# Altium PCB MSP430.PcbDoc
Units mil, origin at the board's own origin, x right, y up, seen from the top; angles counter-clockwise.
Board outline 2295 x 3110 mil, 2 copper layers (Top Layer, Bottom Layer); 33 components, 27 nets, 181 pads, 21 vias.
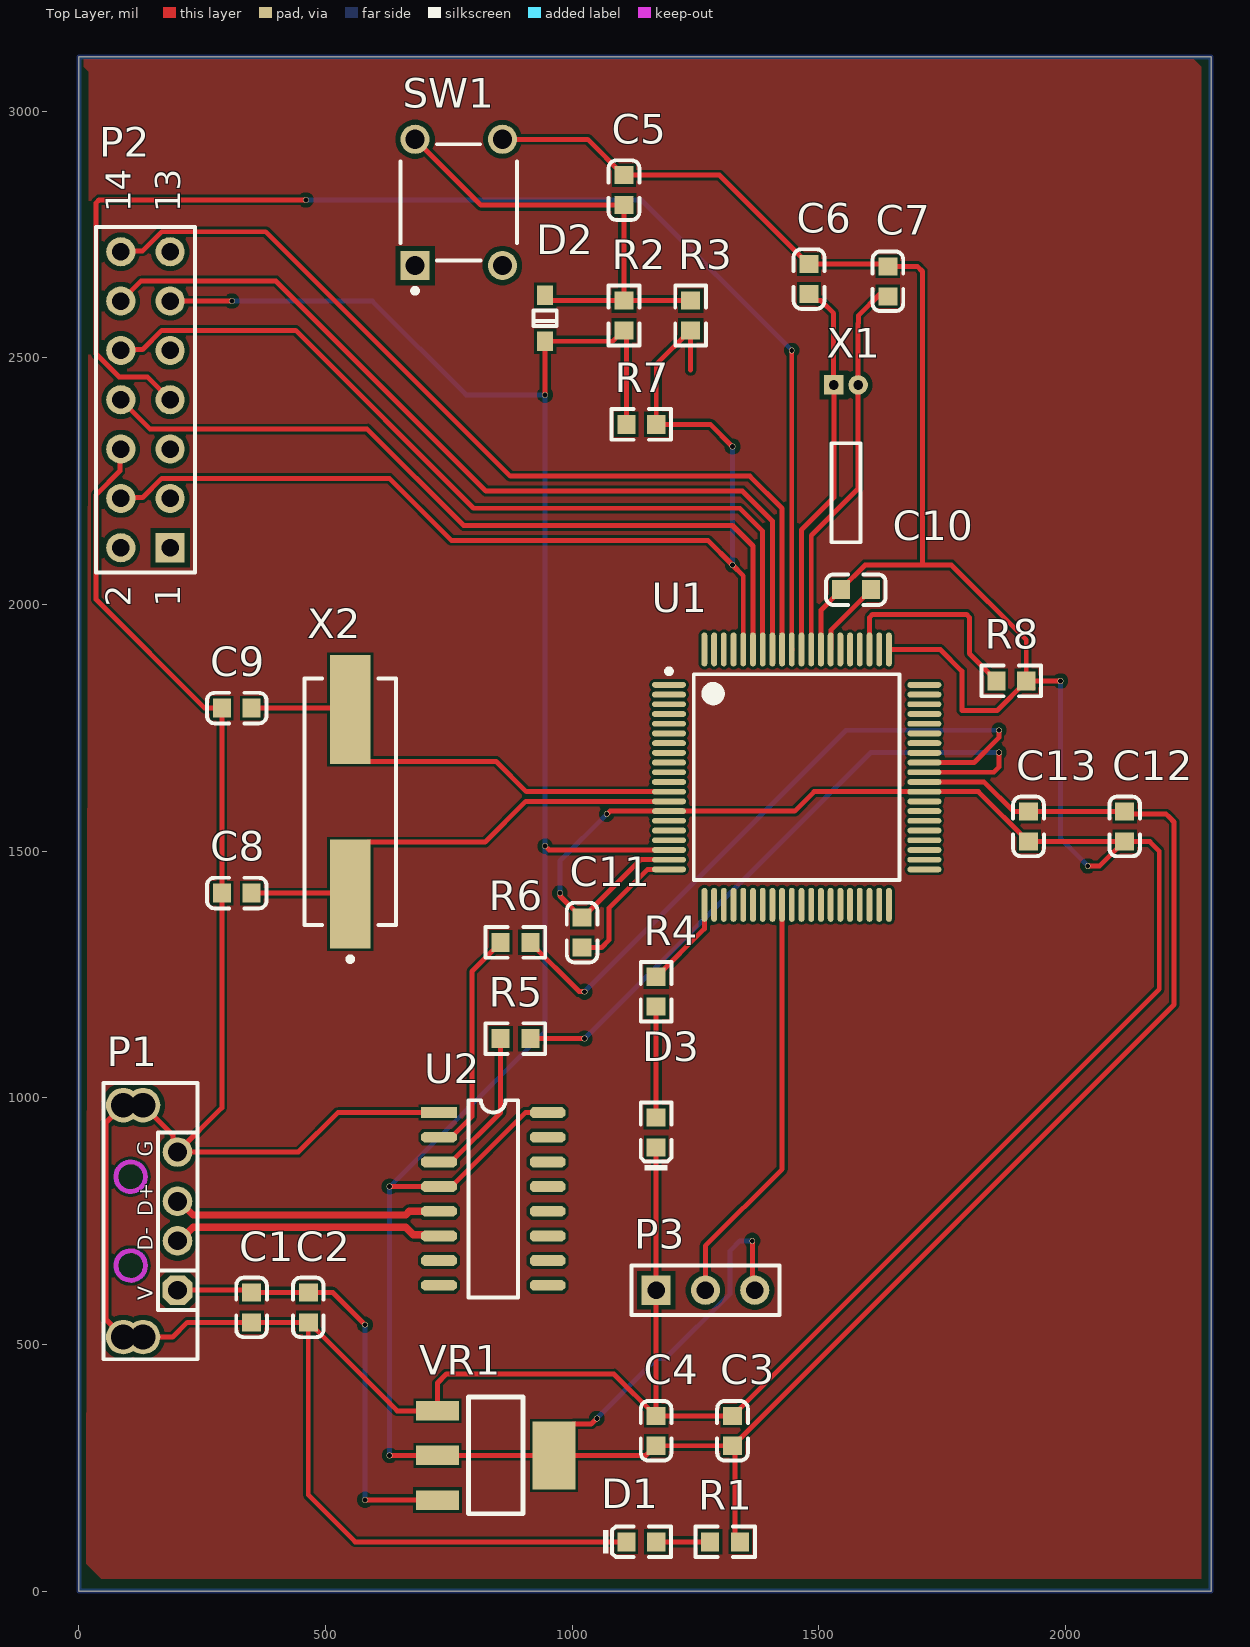
[diagram p0: Top Layer view]
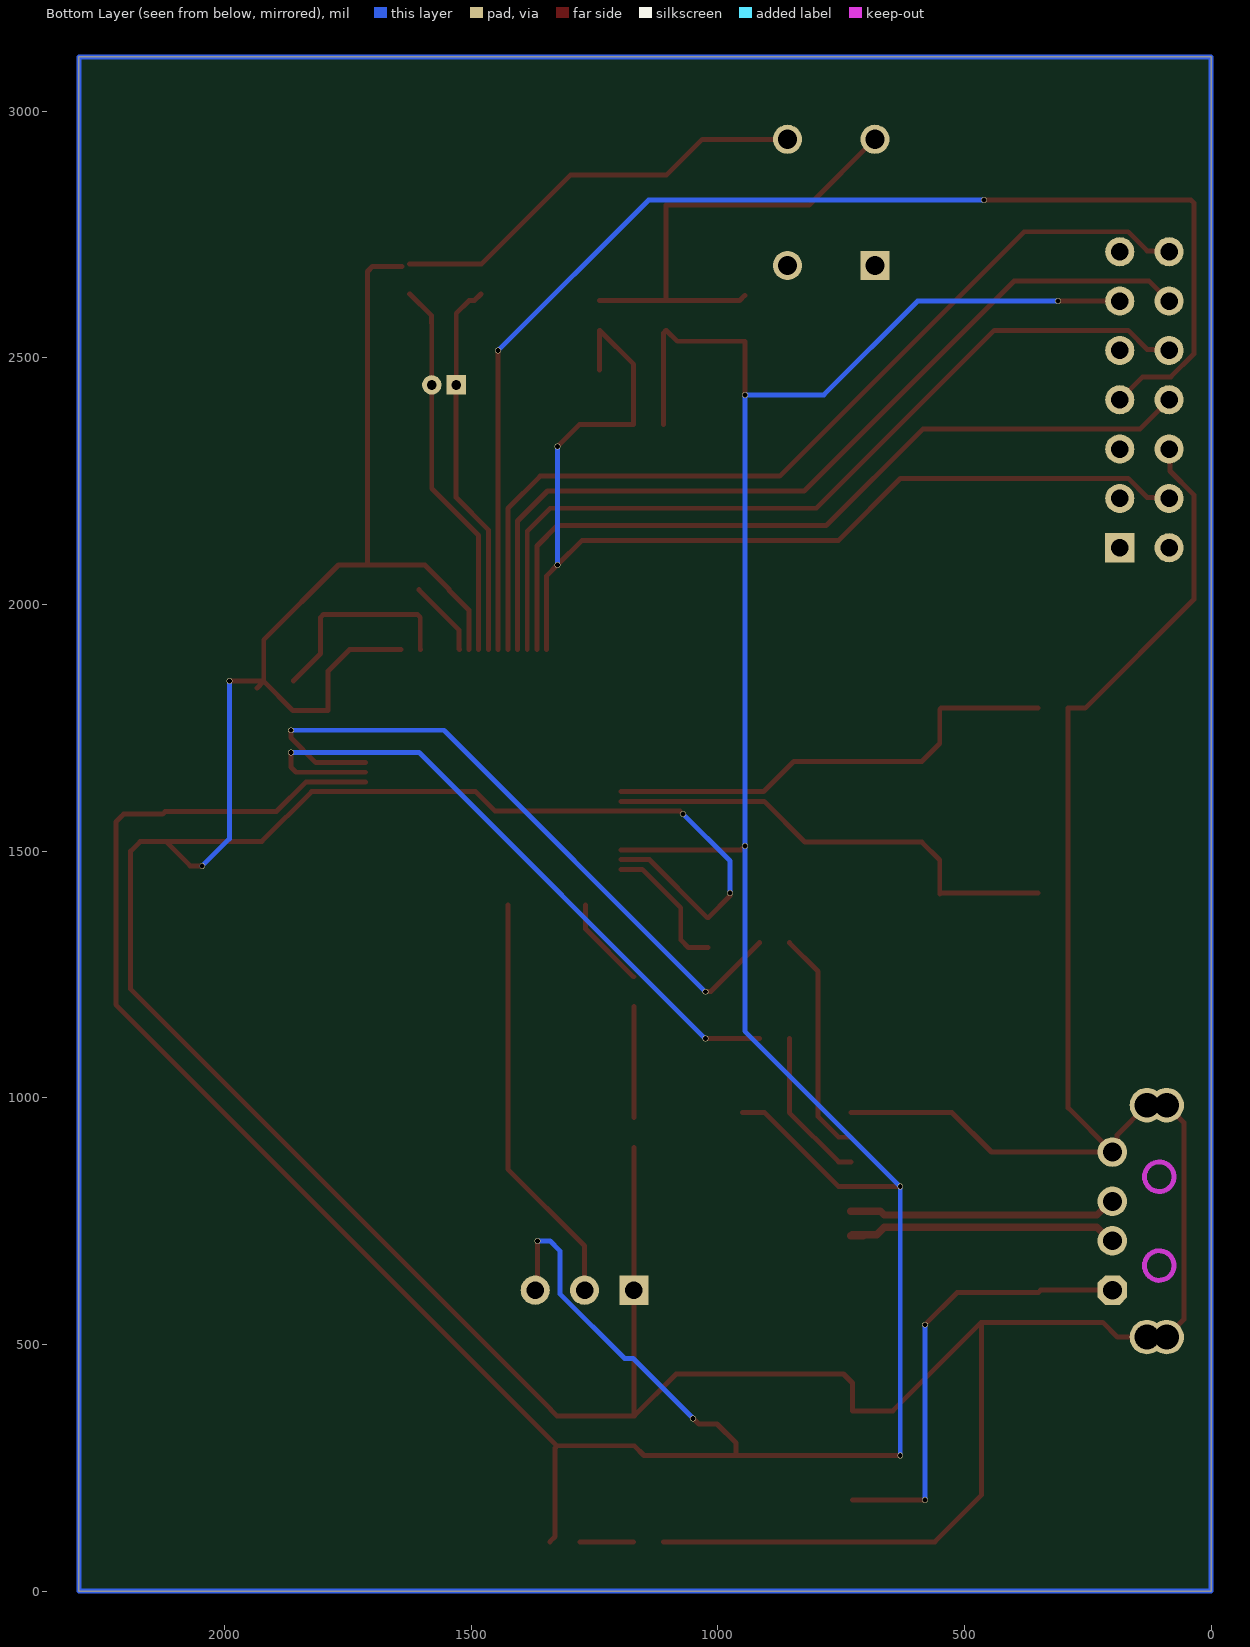
[diagram p1: Bottom Layer view, seen from below]

## Layer stack, top to bottom
Top Solder: solder mask 0.4, Solder Resist, Dk 3.5
Top Layer: signal copper 1.4
Dielectric 1: dielectric 12.6, FR-4, Dk 4.8
Bottom Layer: signal copper 1.4
Bottom Solder: solder mask 0.4, Solder Resist, Dk 3.5

## Board outline
0,0 0,3110 2295,3110 2295,0

## Design rules (kind name [scope] priority, off if disabled: settings)
Clearance [All] p1: gap=6 ignorepadtopadclearanceinfootprint=FALSE except(0: Arc-Hole Track-Hole THPad-Hole Via-Hole Fill-Hole Poly-Hole Region-Hole Text-Hole; 10: THPad-THPad THPad-Via THPad-Fill THPad-Poly THPad-Region THPad-Text Via-Via Via-Fill Via-Poly Via-Region Via-Text Fill-Fill Fill-Poly Fill-Region Fill-Text Poly-Poly Poly-Region Poly-Text Region-Region Region-Text Text-Text)
DiffPairsRouting [All] p1: maxlimit=10 minlimit=10 mostfreqgap=10 toplayer_minwidth=15 toplayer_maxwidth=15 toplayer_prefwidth=15 bottomlayer_minwidth=15 bottomlayer_maxwidth=15 bottomlayer_prefwidth=15 maxuncoupledlength=500
PolygonConnect [All] p1: connectstyle=Relief reliefconductorwidth=10 reliefentries=4 polygonreliefangle="90 Angle" airgapwidth=10
RoutingVias [All] p1: holewidth=28 width=50 viastyle="Through Hole" minholewidth=28 minwidth=50 maxholewidth=28 maxwidth=50
SolderMaskExpansion [All] p1: expansion=4 istentingtop=FALSE
Width [All] p1: maxlimit=10 minlimit=10 preferedwidth=10
29 further rules are at their usual default settings.

## Classes and differential pairs
differential pair UD: +UD_P -UD_N

## Components (designator, comment, footprint, x,y, rotation, side; value= is the part's Value field where it differs from the comment)
C1 "10uF" 0603_C 350,575 r90 top
C2 "100nF" 0603_C 465,575 r90 top
C3 "100nF" 0603_C 1325,325 r270 top
C4 "10uF" 0603_C 1170,325 r270 top
C5 "104" 0603_C 1105,2840 r270 top
C6 "12pF" 0603_C 1480,2659.69 r90 top
C7 "12pF" 0603_C 1640,2655 r90 top
C8 "47pF" 0603_C 320,1415 r180 top
C9 "47pF" 0603_C 320,1790 r180 top
C10 "100nF" 0603_C 1575,2030 r0 top
C11 "100nF" 0603_C 1020,1335 r270 top
C12 "100nF" 0603_C 2120,1550 r90 top
C13 "100nF" 0603_C 1925,1550 r90 top
D1 "红灯 0603" 0603_LED_S1 1140,100 r0 top
D2 "1N4148" SOD-323 945,2580 r90 top
D3 "红灯 0603" 0603_LED_S1 1170,930 r90 top
P1 "Micro USB" USBAM 200,610 r90 top
P2 "JTAG 14" HDR2X7 185,2115 r90 top
P3 "DS18B20" HDR1X3 1170,610 r0 top
R1 "470Ω" 0603_R 1310,100 r180 top
R2 "100K" 0603_R 1105,2585.77 r270 top
R3 "2K" 0603_R 1240,2585.77 r270 top
R4 "470Ω" 0603_R 1170,1215 r270 top
R5 "100Ω" 0603_R 885,1120 r180 top
R6 "100Ω" 0603_R 885,1315 r180 top
R7 "47K" 0603_R 1140,2365 r180 top
R8 "1MΩ" 0603_R 1890,1845 r0 top
SW1 "1825910-6" TECO-1825910-6_V 770,2815 r90 top
U1 "MSP430F5529IPN" TI-PN80_N 1455,1650 r0 top
U2 "CH340C" SOP16 730,970 r270 top
VR1 "AMS1117-3.3" SOT-223 845,275 r180 top
X1 "32.768KHz" ABRA-AB15T-2_V 1555,2445 r90 top
X2 "4MHz" ABRA-ABLS-14.7456MHZ-B2-T_V 550,1600 r90 top

## Footprints (in the part's own frame and the unit in brackets; to place one, negate y for a bottom-side part, rotate by r counter-clockwise, add the part's x,y. Pads: shape width x height; smd on the part's side, far side on the other; paste and mask are expansions set on the pad)
0603_C [mm]
  rect 0.93x0.98 smd: 1(-0.77,0) 2(0.77,0)
  silkscreen extent -1.53,-0.79 1.54,0.79, body extent -0.8,-0.4 0.8,0.4, height 0.3
0603_LED_S1 [mm]
  rect 0.93x0.98 smd: A(0.77,0) K(-0.77,0)
  silkscreen extent -1.97,-0.79 1.54,0.79, body extent -0.8,-0.4 0.8,0.4, height 0.6
0603_R [mm]
  rect 0.93x0.98 smd: 1(-0.77,0) 2(0.77,0)
  silkscreen extent -1.53,-0.79 1.54,0.79, body extent -0.85,-0.4 0.85,0.4, height 0.56
ABRA-AB15T-2_V [mm] "THD, 2-Leads, Body 5.1x1.5mm, Height 1.5mm"
  rect 1x1 hole 0.5: 1(0,0.627)
  round 1 hole 0.5: 2(0,-0.627)
  silkscreen extent -8.1,-0.75 -3,0.75, body extent -8.1,-0.74 0.1,0.77, height 1.5
ABRA-ABLS-14.7456MHZ-B2-T_V [mm] "SMD, 2-Leads, Body 11.4x4.7mm"
  rect 5.6x2.1 smd: 1(-4.75,0) 2(4.75,0)
  silkscreen extent -8.22,-2.35 6.35,2.35, body extent -6.35,-2.35 6.35,2.35, height 4.16
HDR1X3 [mm] "Connector; Header; 3 Position"
  rect 1.5x1.5 hole 0.9: 1(0,0)
  round 1.5 hole 0.9: 2(2.54,0) 3(5.08,0)
  silkscreen extent -1.27,-1.27 6.35,1.27
HDR2X7 [mm] "Connector; Header; 7x2 Position"
  rect 1.5x1.5 hole 0.9: 1(0,0)
  round 1.5 hole 0.9: 2(0,2.54) 3(2.54,0) 4(2.54,2.54) 5(5.08,0) 6(5.08,2.54) 7(7.62,0) 8(7.62,2.54) 9(10.16,0) 10(10.16,2.54) 11(12.7,0) 12(12.7,2.54) 13(15.24,0) 14(15.24,2.54)
  silkscreen extent -1.27,-1.27 16.51,3.81
SOD-323 [mm]
  rect 1x0.83 smd: 1(1.18,0) 2(-1.18,0)
  silkscreen extent -0.4,-0.6 0.4,0.6, body extent -1.35,-0.62 1.35,0.63, height 1.1
SOP16 [mil]
  rect 22x72 smd: 1(0,0)
  oct 22x72 smd: 2(50,0) 3(100,0) 4(150,0) 5(200,0) 6(250,0) 7(300,0) 8(350,0) 9(350,220) 10(300,220) 11(250,220) 12(200,220) 13(150,220) 14(100,220) 15(50,220) 16(0,220)
  silkscreen extent -25,60 375,160
SOT-223 [mm]
  rect 2.2x1 smd: 1(3,-2.3) 2(3,0) 3(3,2.3)
  rect 2.2x3.5 smd: 2(-3,0)
  silkscreen extent -1.4,-3 1.4,3, body extent -3.49,-3.24 3.49,3.24, height 1.64
TECO-1825910-6_V [mm] "Switch, 4-Leads, Body 5.99x5.99mm"
  rect 1.5x1.5 hole 0.99: 1(-3.25,2.25)
  round 1.5 hole 0.99: 2(3.25,2.25) 3(-3.25,-2.25) 4(3.25,-2.25)
  silkscreen extent -4.67,-2.99 2.99,3, body extent -3,-2.99 2.99,3, height 5
TI-PN80_N [mm] "QFP, 80-Leads, Body 12x12mm, Pitch 0.5mm, IPC Medium Density"
  oval 1.75x0.3 smd: 1(-6.575,4.75) 2(-6.575,4.25) 3(-6.575,3.75) 4(-6.575,3.25) 5(-6.575,2.75) 6(-6.575,2.25) 7(-6.575,1.75) 8(-6.575,1.25) 9(-6.575,0.75) 10(-6.575,0.25) 11(-6.575,-0.25) 12(-6.575,-0.75) 13(-6.575,-1.25) 14(-6.575,-1.75) 15(-6.575,-2.25) 16(-6.575,-2.75) 17(-6.575,-3.25) 18(-6.575,-3.75) 19(-6.575,-4.25) 20(-6.575,-4.75) 41(6.575,-4.75) 42(6.575,-4.25) 43(6.575,-3.75) 44(6.575,-3.25) 45(6.575,-2.75) 46(6.575,-2.25) 47(6.575,-1.75) 48(6.575,-1.25) 49(6.575,-0.75) 50(6.575,-0.25) 51(6.575,0.25) 52(6.575,0.75) 53(6.575,1.25) 54(6.575,1.75) 55(6.575,2.25) 56(6.575,2.75) 57(6.575,3.25) 58(6.575,3.75) 59(6.575,4.25) 60(6.575,4.75)
  oval 0.3x1.75 smd: 21(-4.75,-6.575) 22(-4.25,-6.575) 23(-3.75,-6.575) 24(-3.25,-6.575) 25(-2.75,-6.575) 26(-2.25,-6.575) 27(-1.75,-6.575) 28(-1.25,-6.575) 29(-0.75,-6.575) 30(-0.25,-6.575) 31(0.25,-6.575) 32(0.75,-6.575) 33(1.25,-6.575) 34(1.75,-6.575) 35(2.25,-6.575) 36(2.75,-6.575) 37(3.25,-6.575) 38(3.75,-6.575) 39(4.25,-6.575) 40(4.75,-6.575) 61(4.75,6.575) 62(4.25,6.575) 63(3.75,6.575) 64(3.25,6.575) 65(2.75,6.575) 66(2.25,6.575) 67(1.75,6.575) 68(1.25,6.575) 69(0.75,6.575) 70(0.25,6.575) 71(-0.25,6.575) 72(-0.75,6.575) 73(-1.25,6.575) 74(-1.75,6.575) 75(-2.25,6.575) 76(-2.75,6.575) 77(-3.25,6.575) 78(-3.75,6.575) 79(-4.25,6.575) 80(-4.75,6.575)
  silkscreen extent -6.7,-5.3 5.3,5.57, body extent -6,-6 6,6, height 1.6
USBAM [mil]
  oct 60x60 hole 38: 1(0,0)
  round 60 hole 38: 2(100,0) 3(180,0) 4(280,0)
  round 70 hole 50: 5(-95,70) 5(-95,110) 6(375,70) 6(375,110)
  Keep-Out Layer circle w10: c230,95 r30
  Keep-Out Layer circle w10: c50,95 r30
  silkscreen extent -140,-40 420,150

## Part data
C1 C4: library part "0603 10uF (106) 10% 10V", "贴片电容", Package=0603, SuppliersPartNumber=C19702, ComponentLink1Description=供应商链接, ComponentLink1URL=http://www.szlcsc.com/product/details_20411.html, Supplier=LC
C2 C3 C10 C11 C12 C13: library part "0603 100nF (104) 10% 50V", "贴片电容", Package=0603, SuppliersPartNumber=C14663, ComponentLink1Description=供应商链接, ComponentLink1URL=http://www.szlcsc.com/product/details_15331.html, Supplier=LC
C5: library part "0603 1uF (105) 10% 50V", "贴片电容", Package=0603, SuppliersPartNumber=C15849, ComponentLink1Description=供应商链接, ComponentLink1URL=http://www.szlcsc.com/product/details_16531.html, Supplier=LC
C6 C7: library part "0603 12pF (120) 5% 50V", "贴片电容", Package=0603, SuppliersPartNumber=C38523, ComponentLink1Description=供应商链接, ComponentLink1URL=http://www.szlcsc.com/product/details_39506.html, Supplier=LC
C8 C9: library part "0603 47pF (470) 5% 50V", "贴片电容", Package=0603, SuppliersPartNumber=C1671, ComponentLink1Description=供应商链接, ComponentLink1URL=http://www.szlcsc.com/product/details_2023.html, Supplier=LC
D1 D3: library part "0603 红灯", "发光二极管", Package=0603, SuppliersPartNumber=C2286, ComponentLink1Description=供应商链接, ComponentLink1URL=http://www.szlcsc.com/product/details_2659.html, Supplier=LC
D2: library part "SOD-323 1N4148WS T4", "二极管", Package=SOD-323, SuppliersPartNumber=C2128, ComponentLink1Description=供应商链接, ComponentLink1URL=http://www.szlcsc.com/product/details_2485.html, Supplier=LC
P1: library part USB
P2: library part "Header 7X2", "Header, 7-Pin, Dual row", LatestRevisionDate=17-Jul-2002, LatestRevisionNote="Re-released for DXP Platform.", Publisher="Altium Limited"
P3: library part "Header 3", "Header, 3-Pin", LatestRevisionDate=17-Jul-2002, LatestRevisionNote="Re-released for DXP Platform.", Publisher="Altium Limited"
R1 R4: library part "0603 470Ω (4700) 1%", "贴片电阻", Package=0603, SuppliersPartNumber=C23179, ComponentLink1Description=供应商链接, ComponentLink1URL=http://www.szlcsc.com/product/details_23906.html, Supplier=LC
R2: library part "0603 2.7KΩ (2701) 1%", "贴片电阻", Package=0603, SuppliersPartNumber=C13167, ComponentLink1Description=供应商链接, ComponentLink1URL=http://www.szlcsc.com/product/details_13814.html, Supplier=LC
R3: library part "0603 10KΩ (1002) 1%", "贴片电阻", Package=0603, SuppliersPartNumber=C25804, ComponentLink1Description=供应商链接, ComponentLink1URL=http://www.szlcsc.com/product/details_26547.html, Supplier=LC
R5 R6: library part "0603 100Ω (1000) 1%", "贴片电阻", Package=0603, SuppliersPartNumber=C22775, ComponentLink1Description=供应商链接, ComponentLink1URL=http://www.szlcsc.com/product/details_23502.html, Supplier=LC
R7: library part "0603 47KΩ (4702) 1%", "贴片电阻", Package=0603, SuppliersPartNumber=C25819, ComponentLink1Description=供应商链接, ComponentLink1URL=http://www.szlcsc.com/product/details_26562.html, Supplier=LC
R8: library part "0603 1MΩ (1004) 1%", "贴片电阻", Package=0603, SuppliersPartNumber=C22935, ComponentLink1Description=供应商链接, ComponentLink1URL=http://www.szlcsc.com/product/details_23662.html, Supplier=LC
SW1: library part CMP-1684-00021-1, "Tact Switch, SPST-NO, 0.05 A, -35 to 85 degC, 4-Pin THD, RoHS, Bulk", Actuator Color=Black, Contact Rating @ Voltage=0.05A@24VDC, Dielectric Strength=500VAC, Manufacturer="TE Connectivity", Maximum AC Voltage Rating=N/A, Maximum Contact Resistance=100mOhm, Maximum DC Voltage Rating=24V, Minimum Insulation Resistance=100MOhm, Operating Temperature=-35to85C, Package Description="4-Pin Through Hole Device, Body 5.99 x 5.99 mm, Pitch 6.5 mm", Package Reference=THD, Actuator Length=1.4mm, Actuator Material=PolybutyleneTerephthalate, Actuator Style=RoundButton, Base Material=N/A, Body Orientation=Straight, Bushing Type=Unthreaded, Contact Material=CopperAlloy, Contact Plating=Silver, Datasheet URL=http://www.te.com/commerce/DocumentDelivery/DDEController?Action=showdoc&DocId=Customer+Drawing%7F1825910%7FC9%7Fpdf%7FEnglish%7FENG_CD_1825910_C9.pdf%7F1825910-6, Datasheet Version="Rev. C9", Dimension=5.99x5mm, Electrical Life=100000Cycles, Family=1825910, Function=MomentaryContact, Housing Material=N/A, Illumination=N/R, Manufacturer URL=http://www.te.com, Mechanical Life=100000Cycles, Mounting=ThroughHole, Packaging=N/A, Part No=1825910-6, Pole Throw Configuration=SPST, Product Weight=N/A, RoHS=Yes, Seal Description=N/A, Seal Location=N/A, Switch Configuration=OFF(ON), Terminal Type=PCPins, Thread Size=N/R
U1: "25 MHz Mixed Signal Microcontroller with 128 KB Flash, 8192 B SRAM and 63 GPIOs, -40 to 85 degC, 80-pin QFP (PN), Green (RoHS & no Sb/Br)", Frequency(MHz)=25, Manufacturer="Texas Instruments", Supplier Part Number 1=296-27379-2-ND, Temp Sensor=Yes, ADC="12-bit SAR", ADC Channels=16, Brown Out Reset=Yes, Code_JEDEC=MS-018, Comparators=Yes, ComponentLink1Description="Manufacturer URL", ComponentLink1URL=http://www.ti.com/, ComponentLink2Description=Datasheet, ComponentLink2URL=http://www.ti.com/general/docs/lit/getliterature.tsp?genericPartNumber=MSP430F5529&fileType=pdf, ComponentLink3Description="Package Specification", ComponentLink3URL=http://www.ti.com/lit/ml/mtqf010a/mtqf010a.pdf, DatasheetVersion=SLAS590I, DMA=3, Eco-Plan="Green (RoHS & no Sb/Br)", Flash(KB)=128, GPIO=63, Mounting Technology="Surface Mount", Multiplier=32x32, PackageDescription="80-Pin Plastic Quad Flat Pack, Body 12 x 12 mm, Pitch 0.5 mm", PackageReference=PN80, PartNumber=MSP430F5529IPN, Real-Time Clock=Yes, SRAM(B)=8192, SubFamily="5 Series", Supplier 1=Digi-Key, Supplier 2=Digi-Key, Supplier 3=Digi-Key, Supplier 4=Newark, Supplier 5=Mouser, Supplier Part Number 2=296-27379-1-ND, Supplier Part Number 3=296-27379-6-ND, Supplier Part Number 4=55W6845, Supplier Part Number 5=595-MSP430F5528IZQER, SVS=Yes, Timers - 16-bit=4, USB=1, USCI_A (UART/LIN/IrDA/SPI)=2, USCI_B (I2C & SPI)=2, Watchdog=Yes
U2: "USB to Serial / UART"
VR1: library part "SOT-223 AMS1117-3.3", "低压差线性稳压(LDO)", Package=SOT-223, SuppliersPartNumber=C6186, ComponentLink1Description=供应商链接, ComponentLink1URL=http://www.szlcsc.com/product/details_6652.html, Supplier=LC
X1: library part CMP-1326-00001-1, "晶振", Frequency="32.768 kHz", Load Capacitance CL="12.5 pF", Manufacturer=Abracon, PartNumber=AB15T-32.768KHZ, Shunt Capacitance C0="1 pF Typ.", Temperature Range="-20 to 70 degC", ComponentLink1Description="Manufacturer URL", ComponentLink1URL=http://www.abracon.com/, ComponentLink2Description=Datasheet, ComponentLink2URL=http://www.abracon.com/Resonators/AB15T.pdf, ComponentLink3Description="Package Specification", ComponentLink3URL=http://www.abracon.com/Resonators/AB15T.pdf, DatasheetVersion=Jun-10, ESR="40 KOhm Max.", Mounting Technology="Through Hole", PackageDescription="2-Pin THD, Body 5 x 1.4 mm, Pin Spacing 0.45 mm", Packing=Bulk, RoHS=TRUE
X2: library part CMP-2000-05726-1, "晶振", Case Height=4.2mm, Case Length=11.4mm, Case Width=4.7mm, Frequency=8MHz, Frequency Stability=50PPM, Load Capacitance=18pF, Manufacturer=ABRACON, Operating Temperature Range=-20Cto+70C, Package / Case=HC-49/US, Package Description="2-Pin Surface Mount Device, Body 11.4 x 4.7 mm", Package Reference=ABLS-14.7456MHZ-B2-T, Tolerance=30PPM, Brand=ABRACON, Datasheet URL=http://www.abracon.com/Resonators/abls.pdf, Datasheet Version=04/2011, Dimensions=4.7mmWx11.4mmLx4.2mmH, ESR=80Ohms, Factory Pack Quantity=1000, Manufacturer URL=http://www.abracon.com/, Mounting Style=SMD/SMT, Mounting Technology=SurfaceMount, Package URL=http://www.abracon.com/Support/PackageDrawing/Resonators/ABLS-2D.pdf, Packaging=Reel, Product Category=Crystals, RoHS=Details, Series=ABLS, Termination Style=SMD/SMT, Type=LowProfileMicroprocessorCrystal

## Via types
v1: diameter 12, hole 10, Top Layer to Bottom Layer, 21 vias

## Nets (pads, with @x,y where several pads share a name; then routed paths per layer and width w, separated by ;. In a path a pad name is that pad's centre, name@x,y a point inside that pad or via, vN(x,y) a via of type N, cw(c..) or ccw(c..) an arc to the next point about the centre after c; other vN are vias at no path point)
5V: C1.2 C2.2 P1.1 VR1.3 | length 911.1
  Top Layer w10: P1.1 345.32,610 C1.2 C2.2 514.68,605.32 v1(580,540) ; v1(580,185) 726.34,185 VR1.3
  Bottom Layer w10: v1(580,185) v1(580,540)
DQ: P3.2 U1.29 | length 845.5
  Top Layer w10: P3.2 1270,700 1425.47,855.47 U1.29
DVCC: C3.2 C4.2 C12.2 C13.2 D2.2 P2.11 P3.3 R1.1 R2.2 R7.2 U1.18 U1.50 U2.4 U2.16 VR1.2 | length 8054.6
  Top Layer w10: P2.11 v1(310,2615) ; v1(630,275) 726.89,275 VR1.2@963.11,275 ; v1(630,820) U2.4 755,820 905,970 U2.16 ; v1(945,1510) 945.54,1510 953.18,1502.36 U1.18 ; v1(945,2425) D2.2 1082.1,2533.54 1104.02,2555.46 R2.2 1109.68,2550.77 R7.2 ; v1(1050,350) 1049.46,350 1038.36,338.9 1001.42,338.9 963.11,300.59 VR1.2@963.11,275 ; C3.2@1325.98,294.68 2220,1188.7 2220,1559.14 2210,1569.14 2204.14,1575 2125.32,1575 C12.2 C13.2 1894.68,1580.32 1835,1640 1714.02,1640 U1.50 ; R1.1 1330,110.31 1330,289.68 C3.2 C4.2 1169.02,294.68 1149.33,275 VR1.2@963.11,275 ; v1(1365,710) 1365.38,709.62 1365.38,614.62 P3.3
  Bottom Layer w10: v1(310,2615) 595,2615 785,2425 v1(945,2425) v1(945,1510) 945,1135 v1(630,820) v1(630,275) ; v1(1050,350) 1171.8,471.8 1189.11,471.8 1320,602.69 1320,690 1340,710 v1(1365,710)
GND: C1.1 C2.1 C3.1 C4.1 C5.1 C6.2 C7.2 C8.2 C9.2 C10.1 C11.1 C12.1 C13.1 D1.K D3.K P1.4 P1.5 P1.6 P2.6 P3.1 R8.2 SW1.4 U1.14 U1.19 U1.49 U1.61 U1.68 U2.1 VR1.1 | length 12177.6
  Top Layer w10: P2.6 83.16,2313.16 83.16,2270.47 35,2222.31 35,2010 255,1790 C9.2 C8.2 289.68,979.68 P1.4 ; P1.5@90,515 90,515.71 55,550.71 55,950 90,985 130,985 190.43,924.57 190.43,899.57 P1.4 ; P1.5@130,515 190,515 219.68,544.68 C1.1 C2.1 ; U2.1 525,970 445,890 P1.4 ; SW1.4 1031.38,2942.95 1104.02,2870.31 C5.1 1298.7,2870.31 1479.02,2690 C6.2 C7.2@1625,2690 ; 975.38,1408.95 1019.02,1365.32 C11.1 1020.98,1365.32 1138.35,1482.68 U1.19 ; v1(1070,1575) 1070.54,1575 1076.64,1581.1 U1.14 1451.1,1581.1 1490.47,1620.47 U1.49 1823.23,1620.47 1924.02,1519.68 C13.1 C12.1@2119.02,1519.68 ; D1.K@1110,99.69 D1.K 560,100 465,195 C2.1 ; D3.K P3.1 C4.1 ; U1.68@1504.56,1909.2 U1.68 1504.21,1988.54 1544.68,2029.02 C10.1 1544.68,2030.98 1593.7,2080 1710,2080 ; C7.2 1699.68,2685.31 1710,2675 1710,2080 ; U1.61 1746.14,1908.86 1790,1865 1790,1785 1861.3,1785 R8.2@1920.32,1844.02 ; R8.2@1933.62,1830.71 R8.2@1920.32,1844.02 ; v1(1990,1845) R8.2 ; v1(2045,1470) 2069.33,1470 C12.1@2119.02,1519.68 ; C2.1 465.98,544.68 645.12,365.55 VR1.1 726.89,421.89 745,440 1084.33,440 1169.02,355.32 C4.1 ; C4.1 C3.1 1325.98,355.32 1339.29,368.62 1339.29,369.61 2190,1220.32 2190,1500 2170.86,1519.14 2120.54,1519.14 C12.1 C12.1@2119.02,1519.68 ; 1710,2080 1768.7,2080 1920.32,1928.39 R8.2 ; R8.2@1920.32,1844.02 R8.2
  Bottom Layer w10: v1(975,1415) 975,1480 v1(1070,1575) ; v1(1990,1845) 1990,1525 v1(2045,1470)
MCU_RXD: R6.2 U2.2 | length 461.3
  Top Layer w10: U2.2 755,920 796.56,961.56 796.56,1255.89 854.68,1314.02 R6.2
MCU_TXD: R5.2 U2.3 | length 316.3
  Top Layer w10: U2.3 755,870 854.68,969.68 R5.2
NetC5_2: C5.2 D2.1 R2.1 R3.1 SW1.2 | length 971.7
  Top Layer w10: SW1.2 814.68,2809.69 C5.2 R2.1 ; D2.1 955.37,2616.09 R2.1 ; R3.1 R2.1
NetC10_2: C10.2 U1.67 | length 154.9
  Top Layer w10: U1.67 1524.24,1909.2 1524.24,1947.94 1605.32,2029.02 C10.2
NetC11_2: C11.2 U1.20 | length 279.8
  Top Layer w10: C11.2 1059.68,1304.68 1075,1320 1075,1385 1152.99,1462.99 U1.20
NetD1_A: D1.A R1.2 | length 109.4
  Top Layer w10: D1.A R1.2
NetD3_A: D3.A R4.2 | length 224.4
  Top Layer w10: D3.A R4.2
NetR5_1: R5.1 U1.51 | length 1375.3
  Top Layer w10: R5.1 v1(1025,1120) ; U1.51 1854.84,1659.84 1865,1670 v1(1865,1700)
  Bottom Layer w10: v1(1025,1120) 1605,1700 v1(1865,1700)
NetR6_1: R6.1 U1.52 | length 1398.3
  Top Layer w10: R6.1 915.31,1314.02 1013.95,1215.38 1024.62,1215.38 v1(1025,1215) ; U1.52 1814.53,1679.53 1865,1730 v1(1865,1745)
  Bottom Layer w10: v1(1025,1215) 1555,1745 v1(1865,1745)
NetR8_1: R8.1 U1.63 | length 424.1
  Top Layer w10: U1.63 1602.98,1909.2 1602.98,1974.14 1608.84,1980 1799.14,1980 1805,1974.14 1805,1900.67 1859.69,1845.98 R8.1
P1.0: R4.1 U1.21 | length 187
  Top Layer w10: R4.1 1170.98,1245.31 1267.99,1342.32 U1.21
RST#: P2.4 R3.2 R7.1 U1.76 | length 2223.3
  Top Layer w10: P2.4 86.84,2216.84 129.53,2216.84 168.21,2255.53 629.47,2255.53 755,2130 1275,2130 v1(1325,2080) 1346.73,2058.27 U1.76 ; 1240,2475 R3.2 1239.02,2555.46 1170.31,2486.76 R7.1 1280,2365 v1(1325,2320)
  Bottom Layer w10: v1(1325,2080) v1(1325,2320)
SBWTCK: P2.7 U1.71 | length 2639.8
  Top Layer w10: P2.7 138.7,2461.3 81.39,2461.3 35,2507.69 35,2814.14 40.86,2820 v1(460,2820) ; v1(1445,2515) 1445.08,2514.92 1445.08,1908.94 U1.71
  Bottom Layer w10: v1(460,2820) 1140,2820 v1(1445,2515)
TCK: P2.8 U1.75 | length 1613.9
  Top Layer w10: P2.8 144.47,2355.53 584.47,2355.53 780,2160 1325,2160 1366.42,2118.58 U1.75
TDI: P2.12 U1.73 | length 1799.4
  Top Layer w10: P2.12 125.53,2655.53 399.47,2655.53 825,2230 1345,2230 1405.79,2169.21 U1.73
TDO: P2.14 U1.72 | length 1908.6
  Top Layer w10: P2.14 86.84,2716.84 129.53,2716.84 168.21,2755.53 378.84,2755.53 874.37,2260 1360,2260 1425.47,2194.53 U1.72 1425.13,1909.2 U1.72@1425.13,1941.97
TMS: P2.10 U1.74 | length 1726.2
  Top Layer w10: P2.10 86.84,2516.84 129.53,2516.84 168.21,2555.53 439.47,2555.53 800,2195 1339.79,2195 1386.1,2148.69 U1.74
UD_N: P1.2 U2.6 | length 573.4
  Top Layer w15: P1.2 203.79,710 231.29,737.5 662.5,737.5 677.61,722.39 727.61,722.39 U2.6 U2.6@705.21,720
UD_P: P1.3 U2.5 | length 544.5
  Top Layer w15: P1.3 203.79,790 231.29,762.5 662.5,762.5 670,770 U2.5
XIN: C9.1 U1.12 X2.2 | length 956.4
  Top Layer w10: C9.1 547.01,1790 X2.2 550,1718.11 586.34,1681.77 845.9,1681.77 907.2,1620.47 U1.12
XOUT: C8.1 U1.13 X2.1 | length 964.8
  Top Layer w10: C8.1 547.99,1415 X2.1 550,1481.89 586.34,1518.23 823.23,1518.23 905.79,1600.79 U1.13
XT2IN: C7.1 U1.69 X1.2 | length 779.3
  Top Layer w10: U1.69 1484.53,2139.89 1579.68,2235.05 X1.2 1579.68,2569.69 1580,2570 1580,2585.35 1624.02,2629.37 C7.1@1625,2629.37
XT2OUT: C6.1 U1.70 X1.1 | length 774.7
  Top Layer w10: U1.70 1464.84,2151.37 1530.32,2216.84 X1.1 1530,2445.32 1530,2590 1503.94,2616.06 1493.31,2616.06 C6.1
pads on no net: P2.1 P2.2 P2.3 P2.5 P2.9 P2.13 SW1.1 SW1.3 U1.1 U1.2 U1.3 U1.4 U1.5 U1.6 U1.7 U1.8 U1.9 U1.10 U1.11 U1.15 U1.16 U1.17 U1.22 U1.23 U1.24 U1.25 U1.26 U1.27 U1.28 U1.30 U1.31 U1.32 U1.33 U1.34 U1.35 U1.36 U1.37 U1.38 U1.39 U1.40 U1.41 U1.42 U1.43 U1.44 U1.45 U1.46 U1.47 U1.48 U1.53 U1.54 U1.55 U1.56 U1.57 U1.58 U1.59 U1.60 U1.62 U1.64 U1.65 U1.66 U1.77 U1.78 U1.79 U1.80 U2.7 U2.8 U2.9 U2.10 U2.11 U2.12 U2.13 U2.14 U2.15
copper on no net: | length 10810
  Bottom Layer w10: 0,0 2295,0 2295,3110 0,3110 0,0

## Polygon pours and split planes (outlines as drawn)
no net on Top Layer "NONET_L01_P000" (solid, remove dead copper, pour order 0): 20,3080 10,3090 10,3105 2260,3105 2275,3090 2275,25 45,25 15,55

## Text inside footprints (layer, text, board x,y; h text height)
P1: Top Overlay "G" at 150,880 h30 r90; Top Overlay "V" at 150,590 h30 r90; Top Overlay "D+" at 150,760 h30 r90; Top Overlay "D-" at 150,690 h30 r90
P2: Top Overlay "2" at 105,1995 h50 r90; Top Overlay "1" at 205,1995 h50 r90; Top Overlay "14" at 105,2795 h50 r90; Top Overlay "13" at 205,2795 h50 r90